# EAGLE board datasette_connector_panelized (EAGLE 7.7.0)
REVISION: v0.0.1
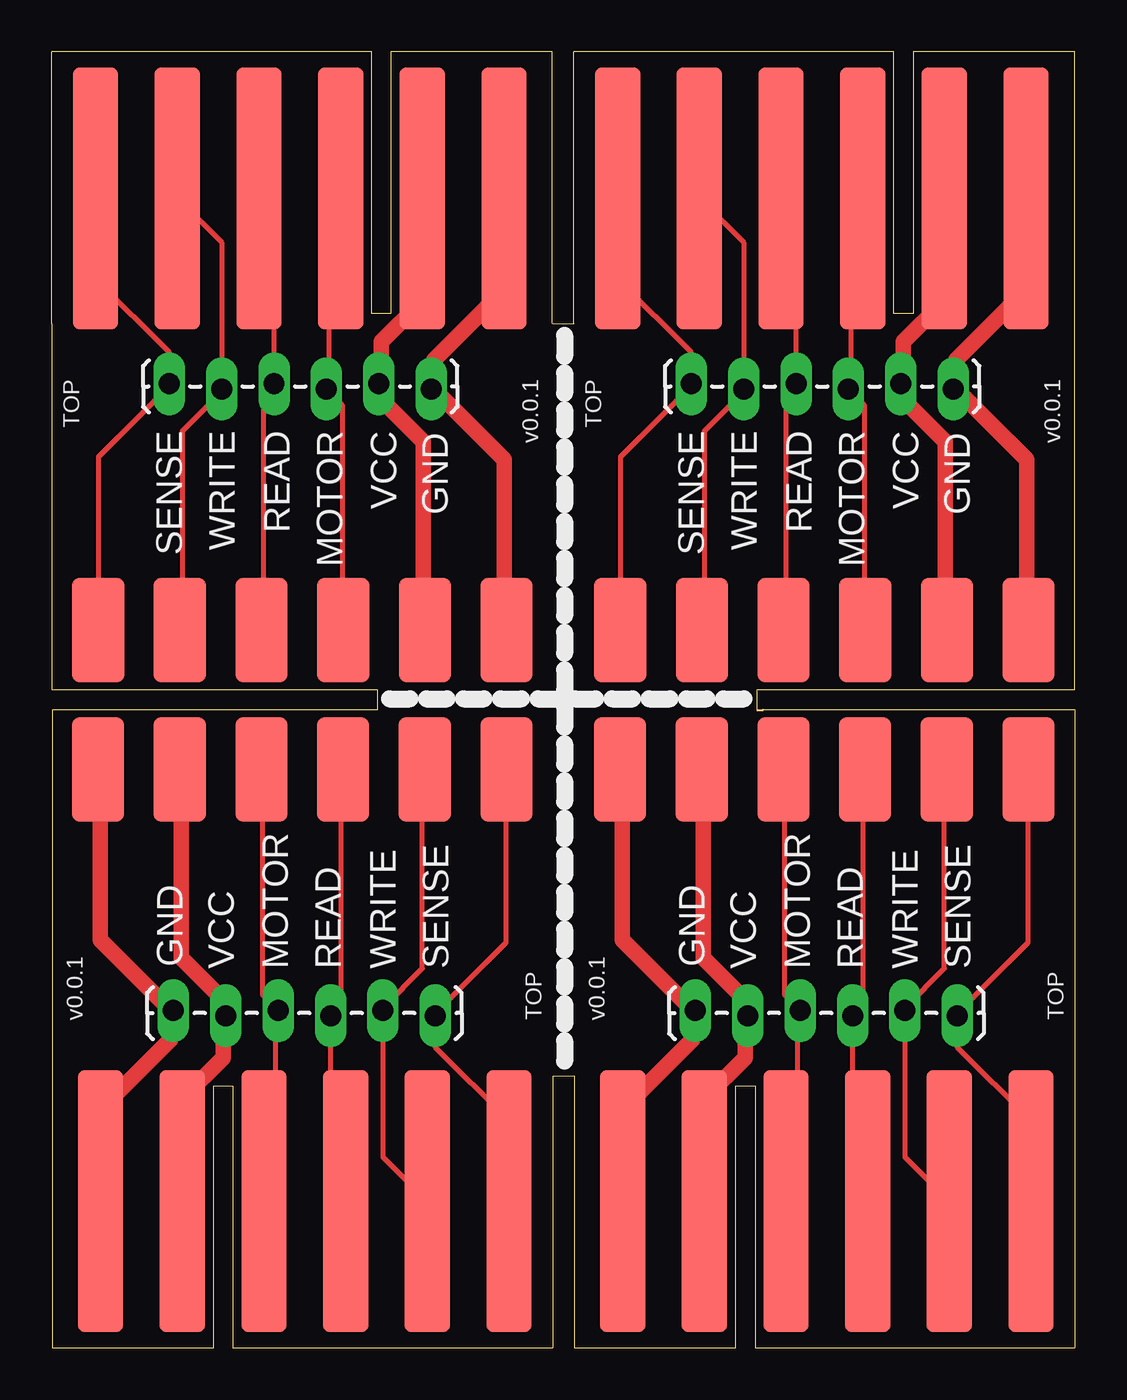
[diagram p0: board, top side]
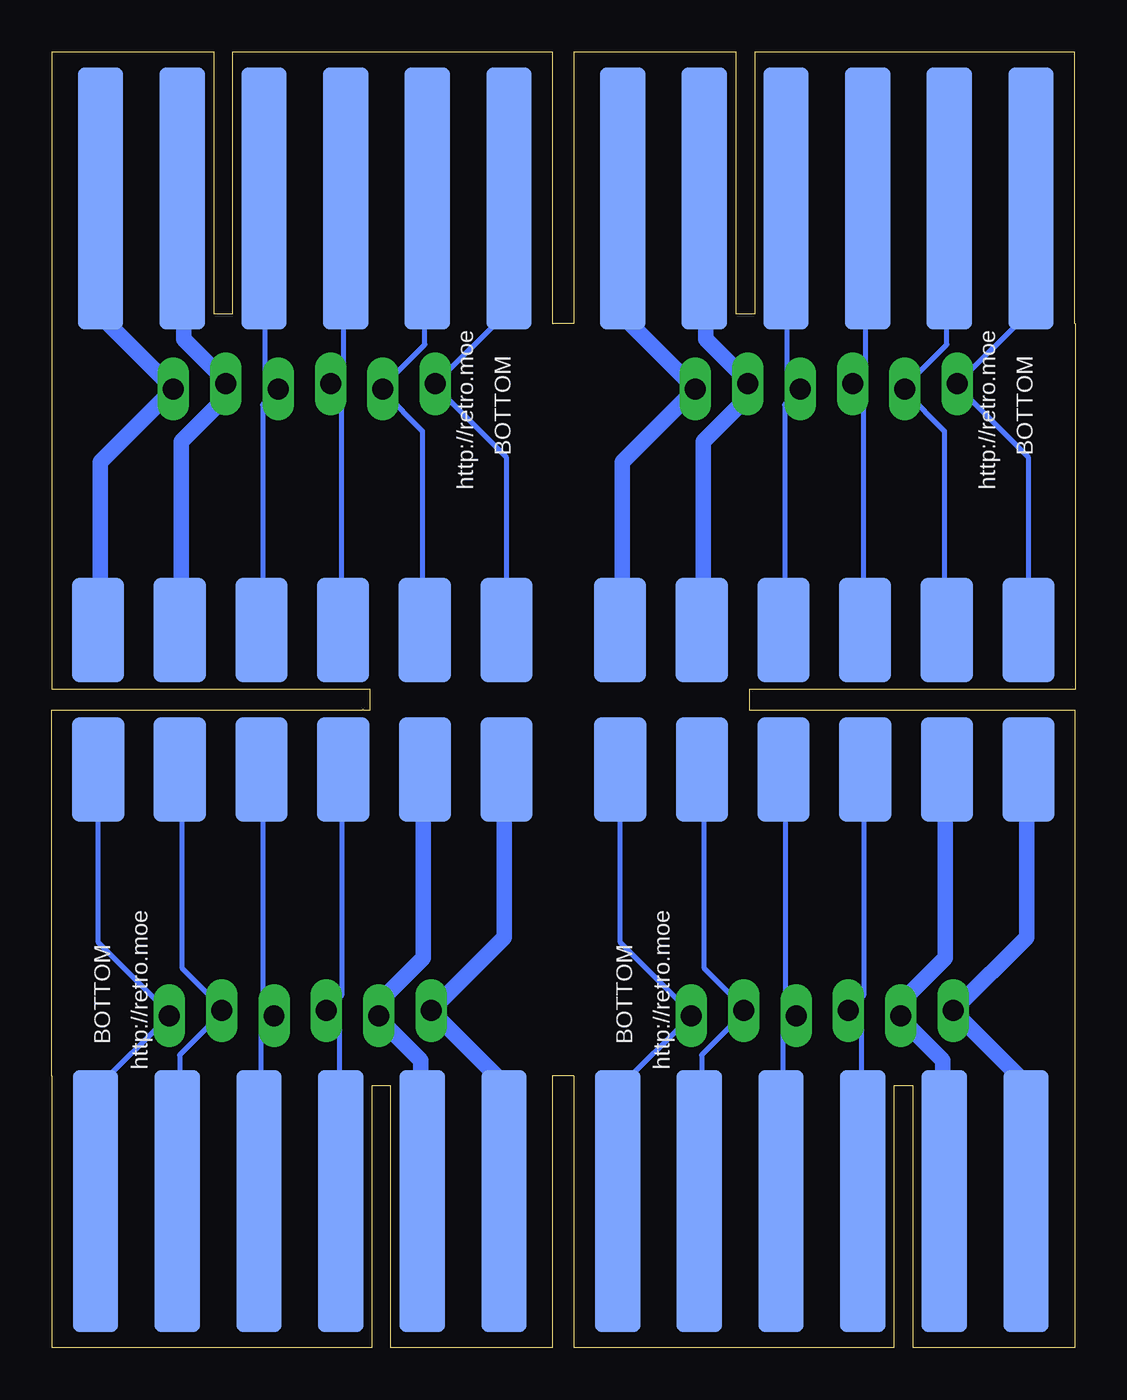
[diagram p1: board, bottom side, seen from below]

Size 49.62 x 62.88 mm. Coordinates in mm from the lower left corner, seen from the top.
Outline: 0,49.69 0,31.93 15.79,31.93
Outline: 34.19,31.93 49.59,31.93 49.59,49.69
Outline: 15.75,30.94 0.03,30.94 0.03,13.19
Outline: 49.62,13.19 49.62,30.94 34.21,30.94
Outline: 24.31,13.21 25.34,13.21
Outline: 24.29,49.67 25.31,49.67 25.31,49.66
Outline: 15.79,31.93 15.8,31.93 15.8,30.94 15.76,30.94
Outline: 34.18,31.93 34.19,31.93 34.19,30.93 34.5,30.93 34.5,30.98
Copper layers (1*16): Top 0.035mm / dielectric 1.5mm / Bottom 0.035mm
Design rules "ITEADstudio_DRC": minimum track width 6mil, minimum drill 12mil, track to track 6mil, track to pad 6mil, pad to pad 6mil, via to via 6mil, smd to smd 0mil, copper to edge 10mil, drill to drill 10mil, minimum pad ring 10mil, minimum via ring 6mil, stop-mask expansion 2mil, vias tented up to drill 100mil, thermal gap 10mil
Net classes: 0 default: width 0.254 mm, clearance 0.254 mm; 1 GND: width 0.762 mm, clearance 0.381 mm; 2 VCC: width 0.762 mm, clearance 0.381 mm

## Footprints (pad centres in the part's own frame; a part is rotated, then mirrored left to right if it is on the bottom)
C64_CASSETTE = smd 2.2 x 12.7: 1 -21.779,-0.5; 2 -17.819,-0.5; 3 -13.859,-0.5; 4 -9.899,-0.5; 5 -5.939,-0.5; 6 -1.979,-0.5 | smd 2.2 x 12.7 bottom: A -21.779,-0.5; B -17.819,-0.5; C -13.859,-0.5; D -9.899,-0.5; E -5.939,-0.5; F -1.979,-0.5
C64_CASSETTE_CONN = smd 2.54 x 5.08: 1 -21.779,3.68; 2 -17.819,3.68; 3 -13.859,3.68; 4 -9.899,3.68; 5 -5.939,3.68; 6 -1.979,3.68 | smd 2.54 x 5.08 bottom: A -21.779,3.68; B -17.819,3.68; C -13.859,3.68; D -9.899,3.68; E -5.939,3.68; F -1.979,3.68
1X06_LOCK_LONGPADS = drill 1.016 long: 1 0,0; 2 2.54,-0.254; 3 5.08,0; 4 7.62,-0.254; 5 10.16,0; 6 12.7,-0.254

## Placement (x,y rotation side)
CN1  C64_CASETTE_EDGE  [C64_CASSETTE]  0.15,55.26 180 top
CN3  C64_CASETTE_CONN  [C64_CASSETTE_CONN]  0.28,31.13 0 bottom
CN11  C64_CASETTE_EDGE  [C64_CASSETTE]  25.46,55.26 180 top
CN12  C64_CASETTE_EDGE  [C64_CASSETTE]  24.16,7.62 0 top
CN13  C64_CASETTE_EDGE  [C64_CASSETTE]  49.47,7.62 0 top
CN31  C64_CASETTE_CONN  [C64_CASSETTE_CONN]  25.59,31.13 0 bottom
CN32  C64_CASETTE_CONN  [C64_CASSETTE_CONN]  24.03,31.74 180 bottom
CN33  C64_CASETTE_CONN  [C64_CASSETTE_CONN]  49.34,31.74 180 bottom
JP  C64 CON  [1X06_LOCK_LONGPADS]  18.41,46.51 180 top
JP1  C64 CON  [1X06_LOCK_LONGPADS]  43.72,46.51 180 top
JP2  C64 CON  [1X06_LOCK_LONGPADS]  5.91,16.37 0 top
JP3  C64 CON  [1X06_LOCK_LONGPADS]  31.21,16.37 0 top

## Library data of the parts
CN1 CN11-CN13 = commodore MOD
CN3 CN31-CN33 = commodore
JP JP1-JP3 = SparkFun

## Nets
GND [GND]: CN1.1 CN1.A CN3.1 CN3.A JP.1
GND1 [GND]: CN11.1 CN11.A CN31.1 CN31.A JP1.1
GND2 [GND]: CN12.1 CN12.A CN32.1 CN32.A JP2.1
GND3 [GND]: CN13.1 CN13.A CN33.1 CN33.A JP3.1
N$2: CN1.5 CN1.E CN3.5 CN3.E JP.5
N$13: CN1.6 CN1.F CN3.6 CN3.F JP.6
N$16: CN1.3 CN1.C CN3.3 CN3.C JP.3
N$21: CN11.5 CN11.E CN31.5 CN31.E JP1.5
N$22: CN12.5 CN12.E CN32.5 CN32.E JP2.5
N$23: CN13.5 CN13.E CN33.5 CN33.E JP3.5
N$38: CN1.4 CN1.D CN3.4 CN3.D JP.4
N$131: CN11.6 CN11.F CN31.6 CN31.F JP1.6
N$132: CN12.6 CN12.F CN32.6 CN32.F JP2.6
N$133: CN13.6 CN13.F CN33.6 CN33.F JP3.6
N$161: CN11.3 CN11.C CN31.3 CN31.C JP1.3
N$162: CN12.3 CN12.C CN32.3 CN32.C JP2.3
N$163: CN13.3 CN13.C CN33.3 CN33.C JP3.3
N$381: CN11.4 CN11.D CN31.4 CN31.D JP1.4
N$382: CN12.4 CN12.D CN32.4 CN32.D JP2.4
N$383: CN13.4 CN13.D CN33.4 CN33.D JP3.4
VCC [VCC]: CN1.2 CN1.B CN3.2 CN3.B JP.2
VCC1 [VCC]: CN11.2 CN11.B CN31.2 CN31.B JP1.2
VCC2 [VCC]: CN12.2 CN12.B CN32.2 CN32.B JP2.2
VCC3 [VCC]: CN13.2 CN13.B CN33.2 CN33.B JP3.2

## Tracks (layer width: path | path; a pad name or v marks a point on that pad's centre or on a via)
GND
  Top 0.762: CN1.A 21.83,55.65 21.83,51.21 18.53,47.91 18.53,46.51 JP.1 18.78,46.26 21.96,43.08 21.96,34.83 CN3.A
  Bottom 0.762: CN3.A 21.96,34.83 21.96,42.95 18.53,46.38 JP.1 18.66,46.76 21.83,49.94 21.83,55.65 CN1.A
GND1
  Top 0.762: CN11.A 47.14,55.65 47.14,51.21 43.84,47.91 43.84,46.51 JP1.1 44.09,46.26 47.27,43.08 47.27,34.83 CN31.A
  Bottom 0.762: CN31.A 47.27,34.83 47.27,42.95 43.84,46.38 JP1.1 43.97,46.76 47.14,49.94 47.14,55.65 CN11.A
GND2
  Top 0.762: CN12.A 2.48,7.22 2.48,11.67 5.78,14.97 5.78,16.36 JP2.1 5.53,16.62 2.35,19.79 2.35,28.05 CN32.A
  Bottom 0.762: CN32.A 2.35,28.05 2.35,19.92 5.78,16.49 JP2.1 5.66,16.11 2.48,12.94 2.48,7.22 CN12.A
GND3
  Top 0.762: CN13.A 27.79,7.22 27.79,11.67 31.09,14.97 31.09,16.36 JP3.1 30.84,16.62 27.66,19.79 27.66,28.05 CN33.A
  Bottom 0.762: CN33.A 27.66,28.05 27.66,19.92 31.09,16.49 JP3.1 30.96,16.11 27.79,12.94 27.79,7.22 CN13.A
N$2
  Top 0.254: CN1.E 6.21,55.65 8.24,53.62 JP.5 8.24,46.38 6.34,44.48 6.34,34.83 CN3.E
  Bottom 0.254: CN3.E 6.34,34.83 6.34,44.48 8.24,46.38 JP.5 8.37,46.51 6.21,48.67 6.21,55.65 CN1.E
N$13
  Top 0.254: CN1.F 2.15,55.65 2.15,51.84 5.7,48.29 JP.6 5.7,46.64 2.27,43.21 2.27,34.83 CN3.F
  Bottom 0.254: CN3.F 2.27,34.83 2.27,43.21 5.7,46.64 JP.6 2.15,50.32 2.15,55.65 CN1.F
N$16
  Top 0.254: CN1.C 13.96,55.65 13.45,55.15 13.45,46.51 JP.3 13.45,46.38 14.08,45.75 14.08,34.83 CN3.C
  Bottom 0.254: CN3.C 14.08,34.83 14.08,45.75 13.45,46.38 JP.3 13.45,46.51 13.96,47.02 13.96,55.65 CN1.C
N$21
  Top 0.254: CN11.E 31.52,55.65 33.55,53.62 JP1.5 33.55,46.38 31.65,44.48 31.65,34.83 CN31.E
  Bottom 0.254: CN31.E 31.65,34.83 31.65,44.48 33.55,46.38 JP1.5 33.68,46.51 31.52,48.67 31.52,55.65 CN11.E
N$22
  Top 0.254: CN12.E 18.1,7.22 16.07,9.25 JP2.5 16.07,16.49 17.97,18.4 17.97,28.05 CN32.E
  Bottom 0.254: CN32.E 17.97,28.05 17.97,18.4 16.07,16.49 JP2.5 15.94,16.36 18.1,14.21 18.1,7.22 CN12.E
N$23
  Top 0.254: CN13.E 43.41,7.22 41.38,9.25 JP3.5 41.38,16.49 43.28,18.4 43.28,28.05 CN33.E
  Bottom 0.254: CN33.E 43.28,28.05 43.28,18.4 41.38,16.49 JP3.5 41.25,16.36 43.41,14.21 43.41,7.22 CN13.E
N$38
  Top 0.254: CN1.D 10.15,55.65 10.78,55.02 JP.4 10.78,46.64 10.27,46.13 10.27,34.83 CN3.D
  Bottom 0.254: CN3.D 10.27,34.83 10.27,46.13 10.78,46.64 JP.4 10.15,47.4 10.15,55.65 CN1.D
N$131
  Top 0.254: CN11.F 27.45,55.65 27.45,51.84 31.01,48.29 JP1.6 31.01,46.64 27.58,43.21 27.58,34.83 CN31.F
  Bottom 0.254: CN31.F 27.58,34.83 27.58,43.21 31.01,46.64 JP1.6 27.45,50.32 27.45,55.65 CN11.F
N$132
  Top 0.254: CN12.F 22.16,7.22 22.16,11.03 18.61,14.59 JP2.6 18.61,16.24 22.04,19.67 22.04,28.05 CN32.F
  Bottom 0.254: CN32.F 22.04,28.05 22.04,19.67 18.61,16.24 JP2.6 22.16,12.56 22.16,7.22 CN12.F
N$133
  Top 0.254: CN13.F 47.48,7.22 47.48,11.03 43.92,14.59 JP3.6 43.92,16.24 47.35,19.67 47.35,28.05 CN33.F
  Bottom 0.254: CN33.F 47.35,28.05 47.35,19.67 43.92,16.24 JP3.6 47.48,12.56 47.48,7.22 CN13.F
N$161
  Top 0.254: CN11.C 39.27,55.65 38.76,55.15 38.76,46.51 JP1.3 38.76,46.38 39.39,45.75 39.39,34.83 CN31.C
  Bottom 0.254: CN31.C 39.39,34.83 39.39,45.75 38.76,46.38 JP1.3 38.76,46.51 39.27,47.02 39.27,55.65 CN11.C
N$162
  Top 0.254: CN12.C 10.35,7.22 10.86,7.73 10.86,16.36 JP2.3 10.86,16.49 10.23,17.13 10.23,28.05 CN32.C
  Bottom 0.254: CN32.C 10.23,28.05 10.23,17.13 10.86,16.49 JP2.3 10.86,16.36 10.35,15.86 10.35,7.22 CN12.C
N$163
  Top 0.254: CN13.C 35.66,7.22 36.17,7.73 36.17,16.36 JP3.3 36.17,16.49 35.54,17.13 35.54,28.05 CN33.C
  Bottom 0.254: CN33.C 35.54,28.05 35.54,17.13 36.17,16.49 JP3.3 36.17,16.36 35.66,15.86 35.66,7.22 CN13.C
N$381
  Top 0.254: CN11.D 35.46,55.65 36.09,55.02 JP1.4 36.09,46.64 35.58,46.13 35.58,34.83 CN31.D
  Bottom 0.254: CN31.D 35.58,34.83 35.58,46.13 36.09,46.64 JP1.4 35.46,47.4 35.46,55.65 CN11.D
N$382
  Top 0.254: CN12.D 14.16,7.22 13.53,7.86 JP2.4 13.53,16.24 14.04,16.75 14.04,28.05 CN32.D
  Bottom 0.254: CN32.D 14.04,28.05 14.04,16.75 13.53,16.24 JP2.4 14.16,15.48 14.16,7.22 CN12.D
N$383
  Top 0.254: CN13.D 39.47,7.22 38.84,7.86 JP3.4 38.84,16.24 39.35,16.75 39.35,28.05 CN33.D
  Bottom 0.254: CN33.D 39.35,28.05 39.35,16.75 38.84,16.24 JP3.4 39.47,15.48 39.47,7.22 CN13.D
VCC
  Top 0.762: CN1.B 17.89,55.65 17.89,50.7 15.99,48.8 15.99,46.76 JP.2 15.99,46.38 15.99,46 18.02,43.97 18.02,34.83 CN3.B
  Bottom 0.762: CN3.B 18.02,34.83 18.02,43.97 15.99,46 15.99,46.64 JP.2 15.99,47.02 17.89,48.92 17.89,55.65 CN1.B
VCC1
  Top 0.762: CN11.B 43.2,55.65 43.2,50.7 41.3,48.8 41.3,46.76 JP1.2 41.3,46.38 41.3,46 43.33,43.97 43.33,34.83 CN31.B
  Bottom 0.762: CN31.B 43.33,34.83 43.33,43.97 41.3,46 41.3,46.64 JP1.2 41.3,47.02 43.2,48.92 43.2,55.65 CN11.B
VCC2
  Top 0.762: CN12.B 6.42,7.22 6.42,12.17 8.32,14.08 8.32,16.11 JP2.2 8.32,16.49 8.32,16.87 6.29,18.9 6.29,28.05 CN32.B
  Bottom 0.762: CN32.B 6.29,28.05 6.29,18.9 8.32,16.87 8.32,16.24 JP2.2 8.32,15.86 6.42,13.95 6.42,7.22 CN12.B
VCC3
  Top 0.762: CN13.B 31.73,7.22 31.73,12.17 33.63,14.08 33.63,16.11 JP3.2 33.63,16.49 33.63,16.87 31.6,18.9 31.6,28.05 CN33.B
  Bottom 0.762: CN33.B 31.6,28.05 31.6,18.9 33.63,16.87 33.63,16.24 JP3.2 33.63,15.86 31.73,13.95 31.73,7.22 CN13.B

## Text on the board
tPlace: TOP | SENSE | WRITE | READ | MOTOR | VCC | TOP | SENSE | WRITE | READ | MOTOR | VCC | GND | GND | GND | GND | VCC | MOTOR | READ | WRITE | SENSE | TOP | VCC | MOTOR | READ | WRITE | SENSE | TOP
bPlace: BOTTOM | BOTTOM | http://retro.moe | http://retro.moe | http://retro.moe | http://retro.moe | BOTTOM | BOTTOM